# Allegro board backup.brd
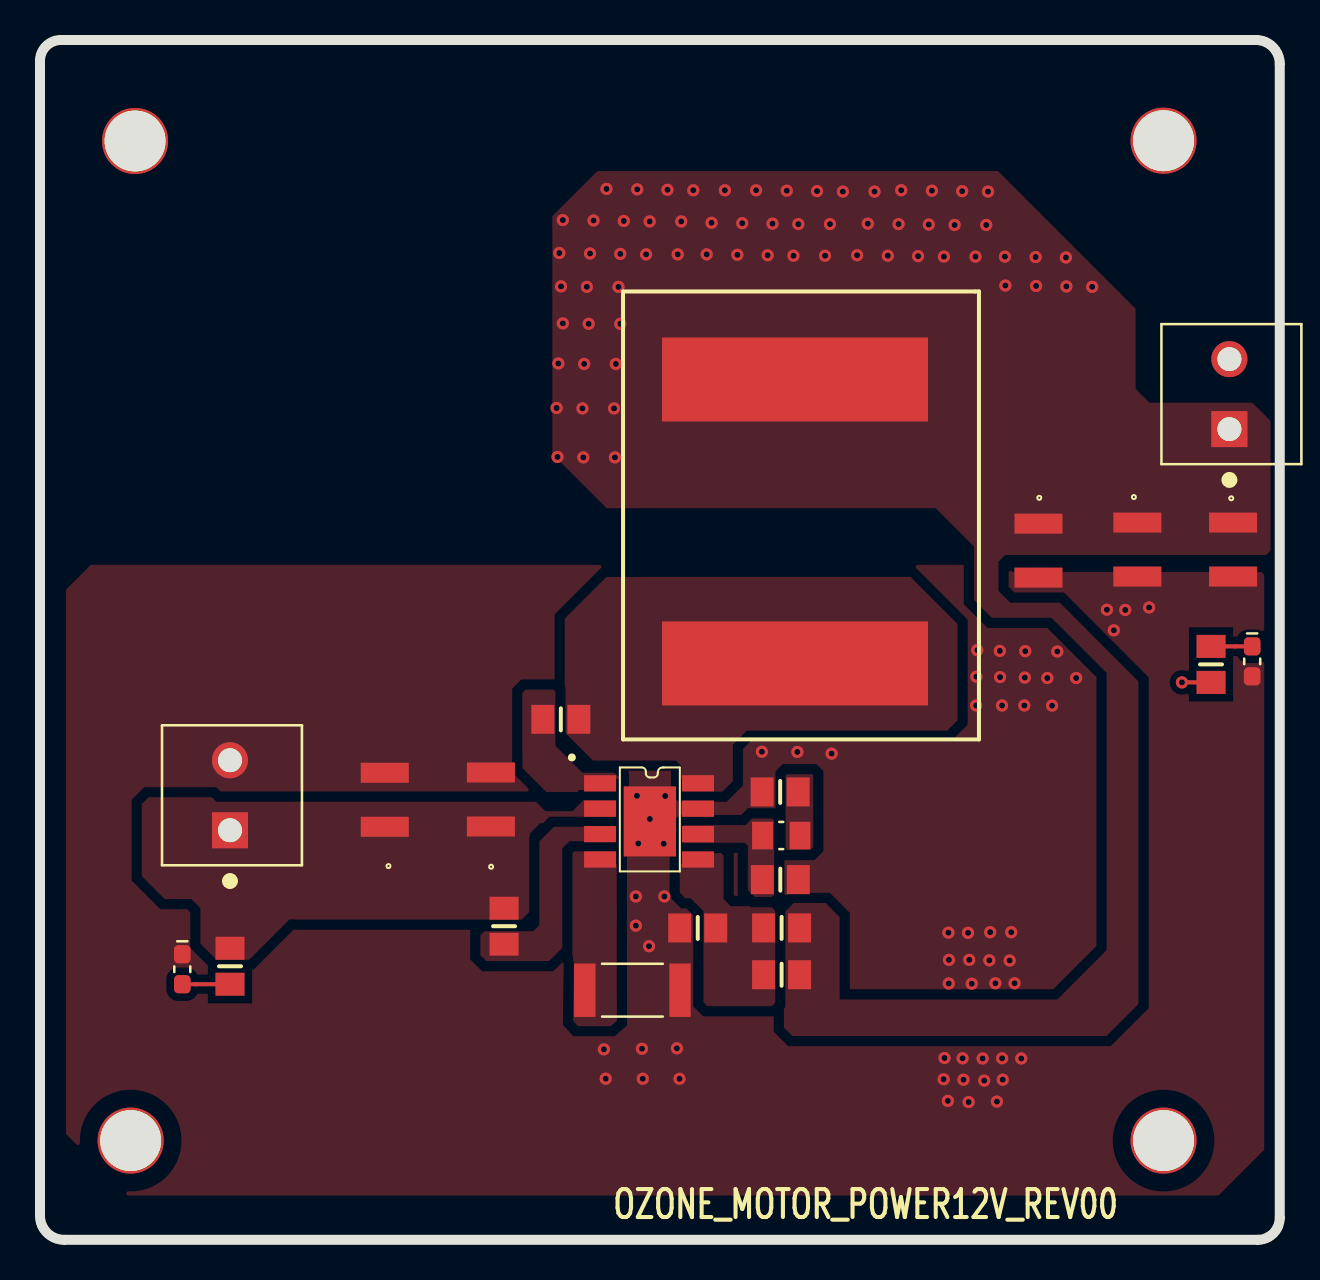
[diagram p0: board, top side]
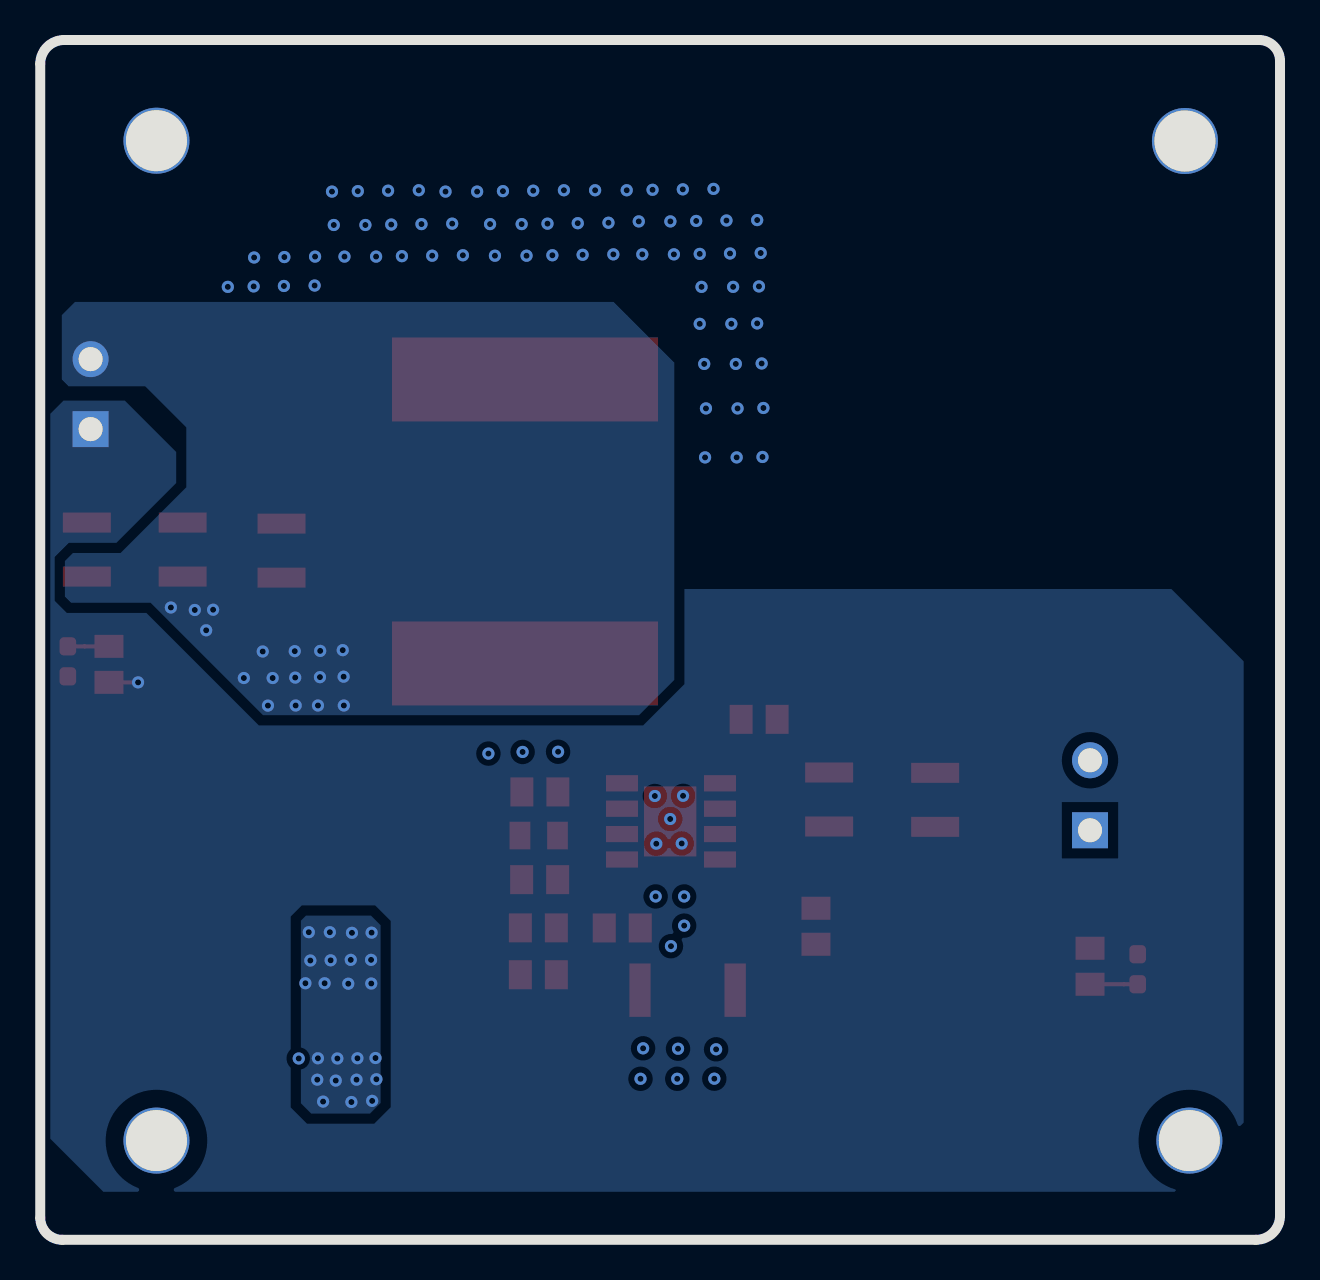
[diagram p1: board, bottom side, seen from below]

Outline 62.02 x 60.01 mm; copper layers: TOP, BOTTOM. Coordinates in mm from the lower left corner of the outline.
Outline path: 0,58.96 arc(0.31,59.7) 1.05,60.01 60.82,60.01 arc(61.66,59.66) 62.01,58.81 62.01,1.11 arc(61.68,0.33) 60.91,0.01 1.2,0.01 arc(0.35,0.36) 0,1.21 0,58.96 ; 0.02,59 arc(0.31,59.71) 1.02,60 61.02,60 arc(61.73,59.71) 62.02,59 62.02,1 arc(61.73,0.29) 61.02,0 1.02,0 arc(0.31,0.29) 0.02,1 0.02,59

## Placement (name value [footprint] x y rotation side)
C1  10UF/20V  [593D106X9020B2TE3]  17.25 23.36 270 top
C2  10UF/20V  [593D106X9020B2TE3]  22.55 23.38 270 top
C3  2.7nf/20V  [0805]  37.02 22.41 0 top
C4  15pf/20V  [0805]  37.03 18.02 180 top
C5  100nf/20V  [0805]  26.05 26.04 180 top
C6  NC  [0805]  37.09 13.26 180 top
C7  22uf/20V  [593D106X9020B2TE3]  49.94 35.82 270 top
C8  22uf/20V  [593D106X9020B2TE3]  54.88 35.88 270 top
C9  22uf/20V  [593D106X9020B2TE3]  59.67 35.88 270 top
D1  Blue  [LEDSC160X80X70L45N]  7.12 13.54 270 top
D2  RED  [LEDSC160X80X70L45N]  60.63 28.94 270 top
J1  CON2  [TE_1776275-2]  9.5 20.49 90 top
J2  CON2  [TE_1776275-2]  59.49 40.55 90 top
L1  10uH  [HCM1A1707V2-100-R]  37.76 28.83 90 top
NOREF  -  [unnamed]  4.52 5.22 0 top
NOREF#2  -  [unnamed]  4.74 55.2 0 top
NOREF#3  -  [unnamed]  56.18 5.22 0 top
NOREF#4  -  [unnamed]  56.18 55.22 0 top
R1  0R  [0805]  23.21 15.69 270 top
R2  200K  [RESC5025X120N]  29.63 12.49 180 top
R3  37.4k  [RESC2012X70N]  37.08 20.23 180 top
R4  140K  [0805]  37.09 15.61 0 top
R5  10K  [0805]  32.9 15.6 0 top
R6  10K  [0805]  9.5 13.69 270 top
R7  1.2K  [0805]  58.57 28.78 90 top
U1  AP64500Q  [SO-8EP]  30.5 20.93 270 top

## Library data of the parts
C1-C9 = C
D1 = LED_9
D2 = LED_10
J1 J2 = CON2_0
L1 = l_0
R1 R2 R4-R7 = RESISTOR_7
R3 = RESISTOR_0
U1 = AP64500Q_3

## Footprints (pads in the part's own frame, mm; a bottom-side part is the same pattern mirrored in y, then rotated)
593D106X9020B2TE3
  rect 1x2.4 smd: 1(0,0) 2(2.7,0)
0805
  rect 1.15x1.45 smd: 1(-0.9,0) 2(0.9,0)
HCM1A1707V2-100-R
  rect 4.2x13.3 smd: 1(0,0) 2(14.2,0)
LEDSC160X80X70L45N
  custom 0.91x0.83 smd: A(0.75,0) C(-0.75,0)
RESC2012X70N
  rect 1.04x1.38 smd: 1(-0.94,0) 2(0.94,0)
RESC5025X120N
  rect 1.07x2.67 smd: 1(-2.38,0) 2(2.38,0)
SO-8EP
  rect 0.81x1.6 smd: 1(-1.907,-2.49) 2(-0.637,-2.49) 3(0.633,-2.49) 4(1.903,-2.49) 5(1.903,2.41) 6(0.633,2.41) 7(-0.637,2.41) 8(-1.907,2.41)
  rect 3.502x2.613 smd: 9(0,0)
TE_1776275-2
  rect 1.8x1.8 hole 1.2: 1(0,0)
  round 1.8 hole 1.2: 2(3.5,0)
unnamed
  round 3.302 hole 3.048: (0.013,-0.244)

## Nets
GND: C1.1 C2.1 C3.1 C4.1 C7.2 C8.2 C9.2 D1.C D2.A J1.2 J2.2 R2.1 R5.1 U1.7(GND) U1.9(GND1)
VIN: C1.2 C2.2 J1.1 R1.1 R6.1 U1.2(VIN)
VOUT: C6.1 C7.1 C8.1 C9.1 J2.1 L1.2 R4.2 R7.1
N104000: R1.2 U1.3(EN)
N104154: R2.2 U1.4(RT)
N104381: C4.2 R3.2 U1.6(COMP)
N104399: C3.2 R3.1
N104581: C5.1 L1.1 U1.8(SW)
N104588: C5.2 U1.1(BST)
N104840: C6.2 R4.1 R5.2 U1.5(FB)
N19598787: D1.A R6.2
N19598817: D2.C R7.2

## Via types
v1: diameter 0.61, hole 0.305, TOP to BOTTOM, 126 vias

## Routing (per net, layer and track width the routed paths; a pad name or vN(x,y) marks a point on that pad's centre or on a via; arc(x,y) is an arc through that point)
GND:
  vias: v1(28.2,9.54) v1(28.29,8.07) v1(29.8,17.18) v1(29.8,15.72) v1(29.86,22.21) v1(29.92,19.83) v1(30.11,9.57) v1(30.15,8.06) v1(30.5,21.05) v1(30.46,14.69) v1(31.2,19.82) v1(31.23,17.18) v1(31.27,22.2) v1(31.86,9.59) v1(31.99,8.06) v1(36.11,24.42) v1(37.88,24.41) v1(39.59,24.32) v1(45.2,8.04) v1(45.24,9.1) v1(45.43,15.37) v1(45.41,6.96) v1(45.46,14.01) v1(45.45,12.83) v1(46.14,9.09) v1(46.19,8.02) v1(46.42,15.36) v1(46.48,14.01) v1(46.44,6.9) v1(46.6,12.82) v1(46.83,28.17) v1(46.82,26.73) v1(46.88,29.5) v1(47.15,9.08) v1(47.23,7.97) v1(47.52,15.39) v1(47.48,13.99) v1(47.78,12.84) v1(47.86,6.92) v1(48.01,29.46) v1(48.02,28.15) v1(48.12,26.73) v1(48.12,9.09) v1(48.15,8.02) v1(48.5,13.98) v1(48.58,15.39) v1(48.74,12.84) v1(49.08,9.08) v1(49.23,26.73) v1(49.28,29.45) v1(49.26,28.12) v1(50.38,28.1) v1(50.62,26.72) v1(50.88,29.43) v1(51.82,28.1) v1(53.36,31.52) v1(53.71,30.49) v1(54.28,31.51) v1(55.47,31.63)
VOUT: length 1.5
  TOP w0.203: R7.1 v1(57.11,27.88)
  vias: v1(25.84,41.61) v1(25.93,43.83) v1(25.88,39.16) v1(25.97,49.36) v1(26.06,47.69) v1(26.15,51) v1(26.15,45.84) v1(27.13,41.58) v1(27.22,43.81) v1(27.18,39.13) v1(27.35,47.66) v1(27.51,49.33) v1(27.44,45.81) v1(27.69,50.98) v1(28.33,52.56) v1(28.71,41.58) v1(28.8,43.81) v1(28.76,39.13) v1(28.93,47.66) v1(29.02,49.31) v1(29.02,45.81) v1(29.2,50.96) v1(29.87,52.54) v1(30.31,49.29) v1(30.49,50.94) v1(31.38,52.52) v1(31.9,49.29) v1(32.07,50.94) v1(32.67,52.49) v1(33.34,49.29) v1(33.59,50.87) v1(34.26,52.49) v1(34.88,49.27) v1(35.12,50.85) v1(35.82,52.49) v1(36.39,49.24) v1(36.64,50.82) v1(37.35,52.47) v1(37.69,49.22) v1(37.93,50.8) v1(38.87,52.45) v1(39.27,49.22) v1(39.51,50.8) v1(40.16,52.43) v1(40.87,49.24) v1(41.4,50.82) v1(41.74,52.43) v1(42.4,49.22) v1(42.94,50.8) v1(43.07,52.49) v1(43.92,49.2) v1(44.45,50.78) v1(44.61,52.47) v1(45.21,49.18) v1(45.75,50.76) v1(46.12,52.45) v1(46.79,49.18) v1(47.33,50.76) v1(47.42,52.43) v1(48.26,49.18) v1(48.28,47.73) v1(49.8,49.15) v1(49.82,47.71) v1(51.31,49.13) v1(51.33,47.69) v1(52.63,47.66)
N19598787: length 2.4
  TOP w0.203: D1.A 7.81,12.79 R6.2
N19598817: length 2.1
  TOP w0.203: R7.2 59.78,29.68 59.78,29.69 D2.C

## Copper pours and planes (outline as drawn; the poured copper is in the pictures)
GND on TOP: 2.54,33.76 48.29,33.76 48.65,33.4 61.1,33.4 61.23,33.27 61.23,4.51 58.94,2.22 4.38,2.22 1.3,5.3 1.3,32.53
GND on BOTTOM: 44.99,6.85 44.99,15.74 45.47,16.22 48.71,16.22 48.97,15.97 48.97,6.84 48.46,6.32 45.51,6.32
GND on BOTTOM: 60.93,43.03 60.93,46.25 60.27,46.91 33.33,46.91 30.29,43.88 30.29,28.01 32.06,26.24 50.87,26.24 56.49,31.87 60.46,31.87 60.78,32.18 60.78,33.95 60.37,34.35 57.99,34.35 54.7,37.64 54.7,40.63 56.76,42.69 60.58,42.69
VIN on TOP: 7.57,17.05 6.23,17.05 5.09,18.19 5.09,21.8 5.43,22.14 8.6,22.14 8.82,21.92 24.8,21.92 25.27,21.45 26.63,21.45 27.19,22 28.78,22 28.86,21.92 28.86,21.14 28.75,21.03 27.11,21.03 26.92,20.84 25.02,20.84 24.51,20.33 24.51,16.44 24.09,16.02 12.75,16.02 12.73,16.03 12.48,16.03 10.46,14.01 8.83,14.01 8.02,14.82 8.02,16.6
VOUT on TOP: 40.05,12.03 50.88,12.03 53.35,14.5 53.35,28.35 50.59,31.11 47.6,31.11 46.71,32.01 46.71,34.68 44.8,36.59 28.34,36.59 25.63,39.31 25.63,51.2 27.88,53.45 47.92,53.45 54.8,46.57 54.8,42.56 55.49,41.87 60.64,41.87 61.55,40.96 61.55,34.48 61.33,34.26 48.27,34.26 47.94,33.92 47.94,32.46 48.53,31.87 51,31.87 54.94,27.93 54.94,11.81 53.34,10.2 37.63,10.2 37.21,10.62 37.21,16.37 37.7,16.85 39.3,16.85 40,16.15 40,12.06
VOUT on BOTTOM: 5.28,2.41 58.85,2.41 61.5,5.06 61.5,41.31 60.84,41.97 57.78,41.97 53.37,37.57 47.15,37.57 46.3,36.72 46.3,33.99 44.86,32.55 5.43,32.55 1.82,28.94 1.82,5.87
N104000 on TOP: 27.36,20.65 28.7,20.65 28.81,20.54 28.81,20.03 28.72,19.94 26.49,19.94 26.12,19.58 26.12,14.61 25.47,13.95 22.32,13.95 22.02,14.24 22.02,15.24 22.22,15.44 24.67,15.44 24.98,15.75 24.98,19.94 25.7,20.66 27.35,20.66
N104154 on TOP: 26.78,19.49 28.76,19.49 28.85,19.4 28.85,17.07 28.85,16.34 28.85,14.58 28.85,10.96 28.54,10.7 26.9,10.7 26.66,10.95 26.7,13.84 26.56,14.73 26.56,19.27
N104381 on TOP: 32.2,20.75 35.28,20.75 35.61,21.08 36.62,21.08 36.72,20.98 36.72,17.28 36.59,17.15 35.75,17.15 35.41,17.5 35.41,19.71 35.25,19.86 33.72,19.86 33.7,19.85 32.18,19.85 32.04,19.99 32.04,20.59
N104399 on TOP: 37.65,19.5 38.53,19.5 38.67,19.65 38.67,23.24 38.62,23.29 37.37,23.29 37.29,23.22 37.29,19.59 37.39,19.5 37.65,19.5
N104581 on TOP: 32.15,22.42 34.13,22.42 34.65,22.94 34.65,24.77 35.36,25.47 45.38,25.47 45.89,25.99 45.89,30.81 43.55,33.15 28.33,33.15 26.25,31.07 26.25,25.38 27.66,23.97 31.81,23.97 32.07,23.71 32.07,22.5
N104588 on TOP: 28.82,22.4 25.32,22.4 24.12,23.6 24.12,27.36 24.29,27.52 25.67,27.52 25.78,27.42 25.78,24.72 27.12,23.37 28.73,23.37 28.96,23.14 28.96,22.54
N104840 on TOP: 32.44,19.54 33.87,19.54 34.19,19.22 34.19,17.05 34.55,16.69 36.54,16.69 36.77,16.46 36.77,11.86 36.6,11.69 33.38,11.69 33.18,11.89 33.18,16.45 32.54,17.1 32.27,17.1 32,17.37 32,19.39 32.15,19.54 32.44,19.54

## Text on the board
Ref Des/Silkscreen Top: OZONE_MOTOR_POWER12V_REV00
NCLEGEND-1-2: FIGURE | SIZE | 12.0 | 47.244 | 120.0 | DRILL CHART: TOP to BOTTOM | ALL UNITS ARE IN MILS | TOLERANCE | +3.0/-12.0 | +0.0/-0.0 | PLATED | QTY | 126 | 4
